# Altium PCB testing.PcbDoc
Units mil, origin at the board's own origin, x right, y up, seen from the top; angles counter-clockwise.
Board outline 1968.5 x 1181.1 mil, 2 copper layers (Top Layer, Bottom Layer); 22 components, 13 nets, 66 pads, 3 vias.
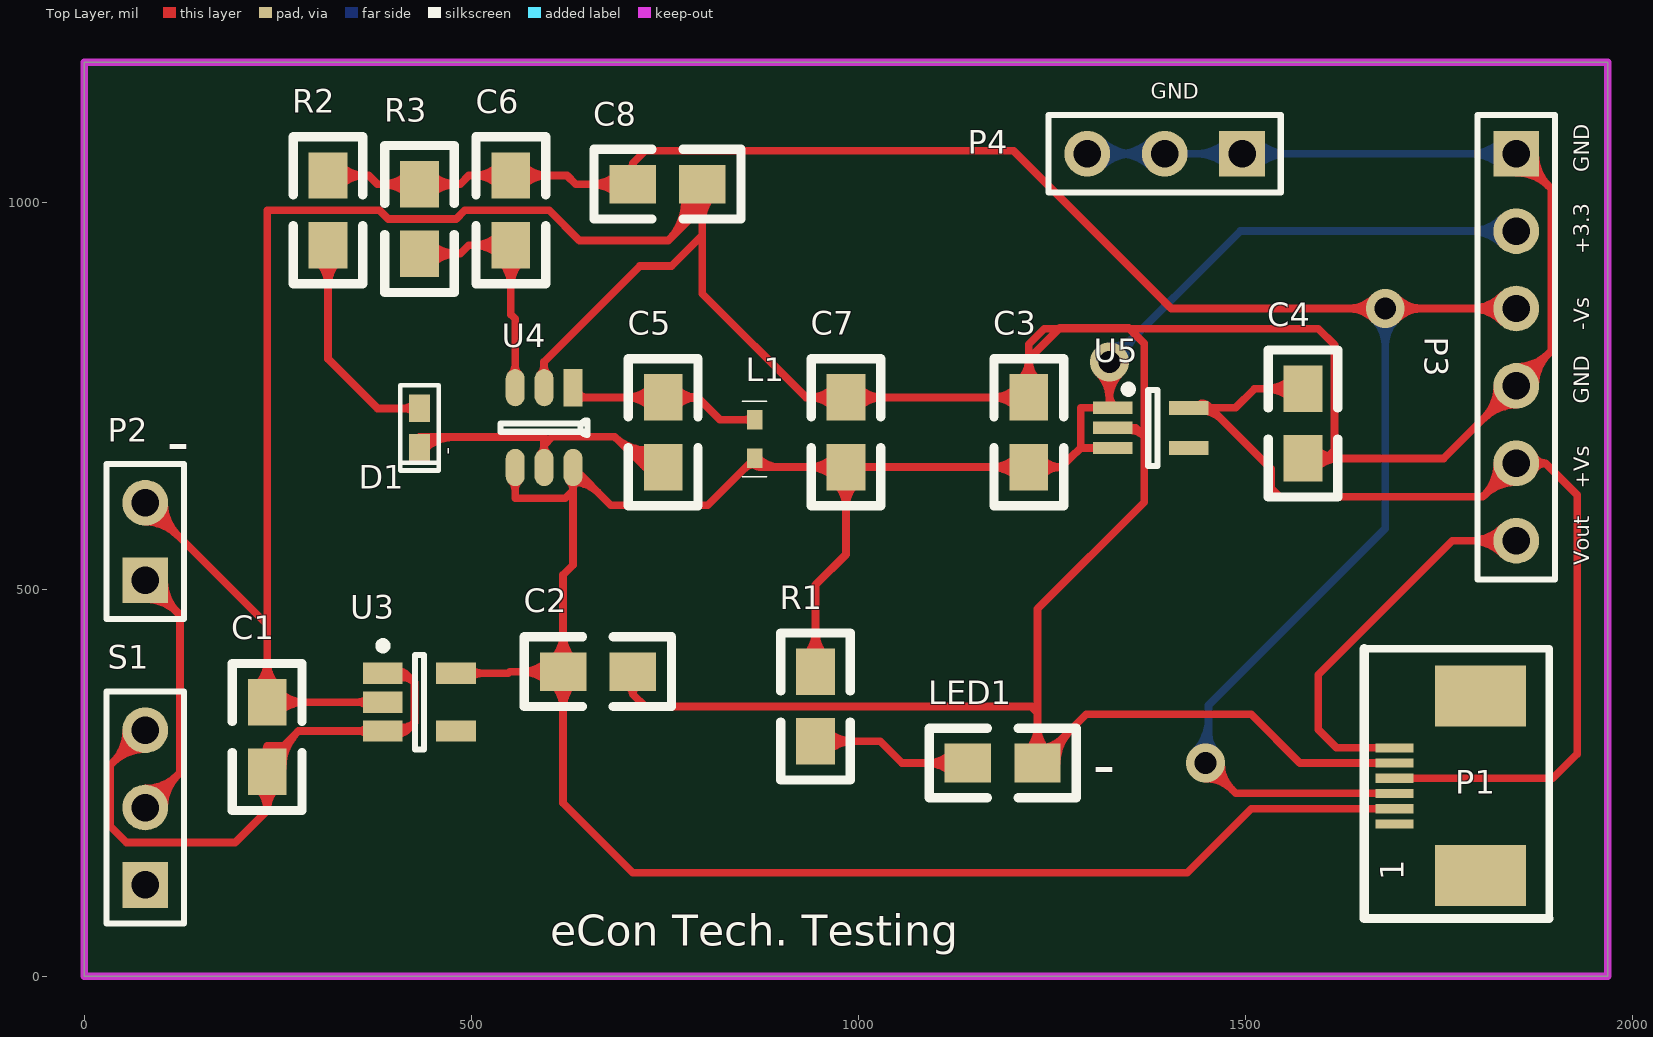
[diagram p0: Top Layer view]
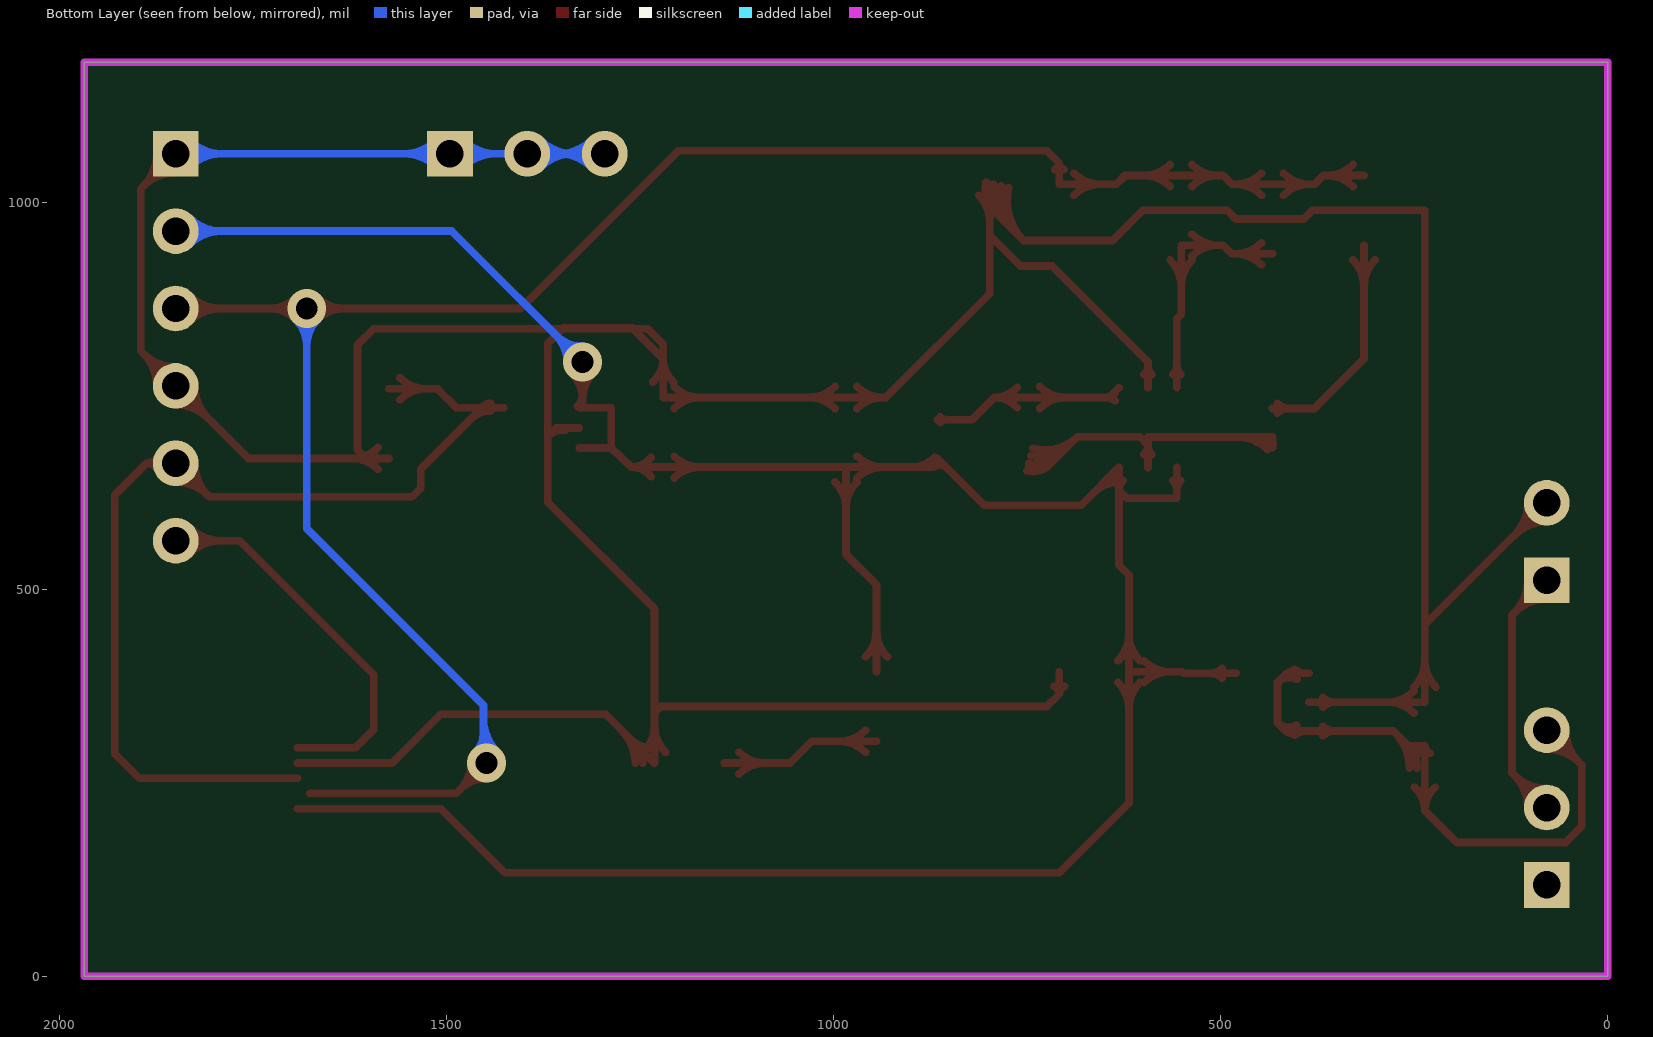
[diagram p1: Bottom Layer view, seen from below]

## Layer stack, top to bottom
Top Layer: signal copper 1.4
Dielectric: dielectric 12.6, FR-4, Dk 4.8
Bottom Layer: signal copper 1.4

## Board outline
0,0 0,1181.1 1968.5,1181.1 1968.5,0 0,0

## Design rules (kind name [scope] priority, off if disabled: settings)
AssemblyTestPointUsage [All] p1 off:
AssemblyTestpoint [All] p1 off: testpointundercomponent=TRUE minsize=40 maxsize=100 preferedsize=60 minholesize=0 maxholesize=40 preferedholesize=32 testpointgrid=1 usegrid=TRUE gridtolerance=0.01 allowsidetop=TRUE allowsidebottom=TRUE
Clearance [All] p1 off: gap=10
ComponentClearance [All] p1 off: gap=10 collisioncheckmode=3 verticalgap=10 showdistances=FALSE
DiffPairsRouting [All] p1 off: maxlimit=10 minlimit=10 mostfreqgap=10 maxuncoupledlength=500
FabricationTestPointUsage [All] p1 off: valid=0 allowmultiple=FALSE
FabricationTestpoint [All] p1 off: side=3 testpointundercomponent=TRUE minsize=40 maxsize=100 preferedsize=60 minholesize=0 maxholesize=40 preferedholesize=32 testpointgrid=1 allowsidetop=TRUE allowsidebottom=TRUE usegrid=TRUE gridtolerance=0.01
FanoutControl Fanout_BGA [IsBGA] p1 off: bgadir=Out bgaviamode=Centered fanoutstyle=Auto fanoutdirection=Alternating viagrid=1 // Fanout_BGA (Default Rule)
FanoutControl Fanout_LCC [IsLCC] p2 off: bgadir=Out bgaviamode=Centered fanoutstyle=Auto fanoutdirection=Alternating viagrid=1 // Fanout_LCC (Default Rule)
FanoutControl Fanout_SOIC [IsSOIC] p3 off: bgadir=Out bgaviamode=Centered fanoutstyle=Auto fanoutdirection=Alternating viagrid=1 // Fanout_SOIC (Default Rule)
FanoutControl Fanout_Small [(CompPinCount < 5)] p4 off: bgadir=Out bgaviamode=Centered fanoutstyle=Auto fanoutdirection=OutThenIn viagrid=1 // Fanout_Small (Default Rule)
FanoutControl Fanout_Default [All] p5 off: bgadir=Out bgaviamode=Centered fanoutstyle=Auto fanoutdirection=Alternating viagrid=1 // Fanout_Default (Default Rule)
Height [All] p1 off: minheight=0 maxheight=1000 prefheight=500
HoleSize [All] p1 off: absolutevalues=TRUE maxlimit=100 minlimit=1 maxpercent=80.000 minpercent=20.000
HoleToHoleClearance [All] p1 off: gap=5 allowstackedmicrovias=TRUE
LayerPairs [All] p1 off: enforce=TRUE
MinimumSolderMaskSliver [All] p1 off: minsoldermaskwidth=5
NetAntennae [All] p1 off: netantennaetolerance=0
PasteMaskExpansion [All] p1 off: expansion=0
PlaneClearance [All] p1 off: clearance=20
PlaneConnect [All] p1 off: planeconnectstyle=Relief reliefexpansion=20 reliefentries=4 reliefconductorwidth=10 reliefairgap=10
PolygonConnect [All] p1: connectstyle=Relief reliefconductorwidth=10 reliefentries=4 polygonreliefangle="90 Angle"
RoutingCorners [All] p1 off: cornerstyle=45-Degree minsetback=100 maxsetback=100
RoutingVias [All] p1: holewidth=28 width=50 viastyle="Through Hole" minholewidth=28 minwidth=50 maxholewidth=28 maxwidth=50
SilkToSilkClearance [All] p1 off: silktosilkclearance=10
SilkscreenOverComponentPads [All] p1 off: minsilkscreentomaskgap=10
SolderMaskExpansion [All] p1: expansion=4
Width [All] p1 off: maxlimit=10 minlimit=10 preferedwidth=10
5 further rules are at their usual default settings.

## Components (designator, comment, footprint, x,y, rotation, side; value= is the part's Value field where it differs from the comment)
C1 "10uf" 0805 236.22,354.33 r270 top
C2 "1uf" 0805 708.66,393.7 r180 top
C3 "" 0805 1220.47,748.03 r270 top
C4 "" 0805 1574.8,669.29 r90 top
C5 "Cap Semi" 0805 748.03,748.03 r270 top
C6 "Cap Semi" 0805 551.18,944.88 r90 top
C7 "Cap Semi" 0805 984.25,748.03 r270 top
C8 "Cap Semi" 0805 708.66,1023.62 r0 top
D1 "Diode" D0402 433.07,708.66 r270 top
L1 "Res3" "0402 - MI" 866.14,669.29 r90 top
LED1 "Green" 0805 1141.73,275.59 r0 top
P1 "Header 6" "6P_0.5mm(FPC) - duplicate - duplicate" 1692.91,196.85 r90 top
P2 "Header 2" HDR1X2 78.74,511.81 r90 top
P3 "Header 6" HDR1X6 1850.39,1062.99 r270 top
P4 "Header 3" HDR1X3 1496.06,1062.99 r180 top
R1 "1K" 0805 944.88,393.7 r270 top
R2 "10" 0805 314.96,944.88 r90 top
R3 "180K" 0805 433.07,1023.62 r270 top
S1 "" HDR1X3 78.74,118.11 r90 top
U3 "RT9013 3.3" SOT23-5AM 433.07,354.33 r0 top
U4 "LT3483" LT3843 590.55,708.66 r270 top
U5 "RT9013 1.8" SC-70-5 1377.95,708.66 r0 top

## Footprints (in the part's own frame and the unit in brackets; to place one, negate y for a bottom-side part, rotate by r counter-clockwise, add the part's x,y. Pads: shape width x height; smd on the part's side, far side on the other; paste and mask are expansions set on the pad)
"6P_0.5mm(FPC) - duplicate - duplicate" [mm]
  rect 2x3 smd: 0(-1.69,-2.825) 7(4.2,-2.825)
  rect 0.3x1.25 smd mask+0.051: 1(0,0.001) 2(0.5,0.001) 3(1,0.001) 4(1.5,0.001) 5(2,0.001) 6(2.5,0.001)
  silkscreen extent -3.1,-5.08 5.75,0.99
"0402 - MI" [mil]
  rect 25x20 smd: 1(0,0) 2(50,0)
  silkscreen extent -24,-16 74,16
0805 [mil]
  rect 60x50 smd: 1(0,0) 2(90,0)
  silkscreen extent -50,-45 140,45
D0402 [mm]
  rect 0.9x0.7 smd: 1(-0.65,0) 2(0.65,0)
  silkscreen extent -1.4,-0.63 1.4,0.64
HDR1X2 [mm] "Connector; Header; 2 Position"
  rect 1.5x1.5 hole 0.9: 1(0,0)
  round 1.5 hole 0.9: 2(2.54,0)
  silkscreen extent -1.27,-1.27 3.81,1.27
HDR1X3 [mm] "Connector; Header; 3 Position"
  rect 1.5x1.5 hole 0.9: 1(0,0)
  round 1.5 hole 0.9: 2(2.54,0) 3(5.08,0)
  silkscreen extent -1.27,-1.27 6.35,1.27
HDR1X6 [mm] "Connector; Header; 6 Position"
  rect 1.5x1.5 hole 0.9: 1(0,0)
  round 1.5 hole 0.9: 2(2.54,0) 3(5.08,0) 4(7.62,0) 5(10.16,0) 6(12.7,0)
  silkscreen extent -1.27,-1.27 13.97,1.27
LT3843 [mm]
  rect 1.22x0.62 smd: 1(-1.321,1.041)
  oval 1.22x0.62 smd: 2(-1.321,0.091) 3(-1.321,-0.859) 4(1.299,-0.859) 5(1.299,0.091) 6(1.299,1.041)
  silkscreen extent -0.25,-1.33 0.23,1.52
SC-70-5 [mil]
  rect 51.18x16 smd: 1(-49,26) 2(-49,0) 3(-49,-26)
  rect 51.18x18 smd: 4(49,-26) 5(49,26)
  silkscreen extent -34,-49 9,55
SOT23-5AM [mm] "SOT23, 5-Leads, Body 2.9x1.7mm, Pitch 0.95mm, Lead Span 2.8mm, IPC Low Density"
  rect 1.3x0.7 smd: 1(-1.2,0.95) 2(-1.2,0) 3(-1.2,-0.95) 4(1.2,-0.95) 5(1.2,0.95)
  silkscreen extent -1.32,-1.55 0.15,1.97, body extent -0.9,-1.55 0.9,1.55, height 1.45

## Part data
C1 C2 C3 C4: library part Cap, "Capacitor"
C5 C6 C7 C8: "Capacitor (Semiconductor SIM Model)"
D1: "Default Diode"
L1: "Resistor"
LED1: library part LED0, "Typical INFRARED GaAs LED"
P1 P3: "Header, 6-Pin"
P2: "Header, 2-Pin"
P4: "Header, 3-Pin"
R1 R2 R3: library part Res2, "Resistor"
S1: library part Switch
U3 U5: library part "RT9013 SOT235"

## Via types
v1: diameter 50, hole 28, Top Layer to Bottom Layer, 3 vias

## Nets (pads, with @x,y where several pads share a name; then routed paths per layer and width w, separated by ;. In a path a pad name is that pad's centre, name@x,y a point inside that pad or via, vN(x,y) a via of type N, cw(c..) or ccw(c..) an arc to the next point about the centre after c; other vN are vias at no path point)
+3.3V: C2.2 C3.2 C7.2 L1.1 P1.2 P3.2 R1.1 U3.5 U4.4 U4.6 U5.1 U5.3 | length 4749.2
  Top Layer w10: U3.5 547.65,391.73 549.61,393.7 C2.2 ; U3.5@498.33,385.53 cw(c513.32,370.54) 513.32,391.73 cw(c513.32,412.93) U3.5@498.33,397.94 ; U4.4@551.65,640.61 cw(c539.35,628.31) 556.75,628.31 cw(c574.14,628.31) U4.4@561.84,640.61 ; U4.4 556.75,617.8 556.84,617.7 621.46,617.7 631.55,627.8 ; C2.2@599.52,379.56 ccw(c565.38,345.42) 565.38,393.7 ccw(c565.38,441.99) C2.2@599.52,407.84 ; C2.2@604.52,379.56 cw(c570.38,345.42) 618.66,345.42 cw(c666.95,345.42) C2.2@632.8,379.56 ; C2.2@604.52,407.84 ccw(c570.38,441.99) 618.66,441.99 ccw(c666.95,441.99) C2.2@632.8,407.84 ; U4.6@626.46,640.61 cw(c614.16,628.31) 631.55,628.31 cw(c648.95,628.31) U4.6@636.65,640.61 ; U4.6@631.55,638.5 cw(c631.55,592.59) 664.01,625.05 ; U4.6@631.55,648.5 cw(c631.55,626.73) 646.94,642.12 ; 853.34,656.49 cw(c866.14,643.68) L1.1@866.14,661.79 ; L1.1@862.61,663.26 ccw(c875.22,675.87) L1.1@875.22,658.03 ; L1.1@866.67,661.82 cw(c868.08,648.71) 877.4,658.03 ; L1.1@869.68,670.33 ccw(c899.36,700.01) 899.36,658.03 ; R1.1@930.74,412.84 ccw(c896.6,446.99) 944.88,446.99 ccw(c993.17,446.99) R1.1@959.02,412.84 ; R1.1 944.88,505.8 984.25,545.17 C7.2 ; C7.2@970.11,638.89 cw(c935.97,604.75) 984.25,604.75 cw(c1032.54,604.75) C7.2@998.39,638.89 ; C7.2@970.11,643.89 ccw(c935.97,609.75) 935.97,658.03 ccw(c935.97,706.32) C7.2@970.11,672.17 ; C3.2@1206.33,643.89 ccw(c1172.19,609.75) 1172.19,658.03 ccw(c1172.19,706.32) C3.2@1206.33,672.17 ; C3.2@1236.19,645.67 cw(c1261.64,625.65) 1261.64,658.03 ; C3.2@1236.19,670.39 ccw(c1261.64,690.41) 1261.64,658.03 ; v1@1310.5,779.65 cw(c1276.36,745.51) 1324.65,745.51 cw(c1372.93,745.51) v1@1338.79,779.65 ; 1324.65,752.3 ccw(c1346.6,752.3) U5.1@1331.08,736.78 ; v1(1324.65,793.8) U5.1@1324.65,734.66 ; U5.3 1287.65,682.66 ; U5.1 U5.1@1324.65,734.66 ; P1.2 1507.87,216.54 1425.2,133.86 708.66,133.86 618.66,223.86 C2.2 ; C2.2 618.66,518.8 631.55,531.69 631.55,627.8 ; 631.55,627.8 U4.6 680.27,608.8 805.65,608.8 L1.1 877.4,658.03 ; 877.4,658.03 C7.2 ; C7.2 C3.2 1261.65,658.03 ; 1261.65,658.03 1287.65,682.66 ; 1287.65,682.66 1287.65,734.66 U5.1@1324.65,734.66
  Bottom Layer w10: v1(1324.65,793.8) 1493.84,962.99 P3.2 ; v1@1324.65,813.8 ccw(c1324.65,862.08) 1358.79,827.94 ccw(c1392.93,793.8) v1@1344.65,793.8 ; P3.2@1833.05,945.65 ccw(c1791.18,903.78) 1791.18,962.99 ccw(c1791.18,1022.21) P3.2@1833.05,980.33 ; P3.2@1840.12,952.72 ccw(c1815.32,927.92) 1815.32,962.99 ccw(c1815.32,998.06) P3.2@1840.12,973.26
+3.7V: P1.1
+4.2V: P2.1 S1.2 | length 627.1
  Top Layer w10: S1.2 123.65,263.02 123.65,466.91 P2.1 ; S1.2@78.74,232.64 ccw(c78.74,267.71) 103.54,242.91 ccw(c128.34,218.11) S1.2@93.27,218.11 ; S1.2@78.74,242.64 ccw(c78.74,301.85) 120.61,259.98 ccw(c162.48,218.11) S1.2@103.27,218.11 ; P2.1@78.74,487.28 cw(c78.74,428.07) 120.61,469.94 cw(c162.48,511.81) P2.1@103.27,511.81 ; P2.1@78.74,497.28 cw(c78.74,462.21) 103.54,487.01 cw(c128.34,511.81) P2.1@93.27,511.81
+VS: C4.2 P1.4 P3.5 U5.5 | length 1660
  Top Layer w10: U5.5 1454.65,734.66 ; U5.5@1443.54,730.66 cw(c1443.54,694.2) 1469.32,719.98 ; U5.5@1443.54,740.66 cw(c1443.54,728.35) U5.5@1452.25,737.05 ; C4.2@1560.66,745.15 ccw(c1526.52,711.01) 1526.52,759.29 ccw(c1526.52,807.58) C4.2@1560.66,773.43 ; C4.2 1512.28,759.29 1487.65,734.66 1454.65,734.66 ; P1.4 1897.64,255.91 1929.13,287.4 1929.13,622.05 1888.19,662.99 ; P3.5@1825.87,662.99 cw(c1766.65,662.99) 1808.52,621.12 cw(c1850.39,579.25) P3.5@1850.39,638.46 ; P3.5@1835.87,662.99 cw(c1800.79,662.99) 1825.59,638.19 cw(c1850.39,613.39) P3.5@1850.39,648.46 ; P3.5@1872.79,653 cw(c1888.19,646.14) 1888.19,662.99 ; P3.5@1872.79,672.98 ccw(c1888.19,679.85) 1888.19,662.99 ; U5.5@1446.37,731.83 cw(c1453.2,725) 1453.2,734.66 ; U5.5@1446.37,731.83 cw(c1453.2,725) 1453.2,734.66 ; U5.5@1446.37,731.83 cw(c1453.2,725) 1453.2,734.66 ; U5.5@1446.37,737.49 ccw(c1453.2,744.32) 1453.2,734.66 ; U5.5@1446.37,737.49 ccw(c1453.2,744.32) 1453.2,734.66 ; U5.5@1446.37,737.49 ccw(c1453.2,744.32) 1453.2,734.66 ; 1454.65,734.66 1533.65,655.66 1533.65,630.8 1544.65,619.8 1807.2,619.8 P3.5 1888.19,662.99
-VS: C6.2 C8.1 P1.3 P3.3 R2.2 R3.1 | length 3637.2
  Top Layer w10: R2.2 367.65,1034.88 378.91,1023.62 R3.1 485.65,1023.62 496.91,1034.88 C6.2 623.65,1034.88 634.91,1023.62 C8.1 708.66,1050.83 ; R2.2@329.1,1020.74 cw(c363.24,986.6) 363.24,1034.88 cw(c363.24,1083.17) R2.2@329.1,1049.02 ; R3.1@418.93,1009.48 ccw(c384.79,975.34) 384.79,1023.62 ccw(c384.79,1071.91) R3.1@418.93,1037.76 ; R3.1@447.21,1009.48 cw(c481.36,975.34) 481.36,1023.62 cw(c481.36,1071.91) R3.1@447.21,1037.76 ; C6.2@537.04,1020.74 ccw(c502.9,986.6) 502.9,1034.88 ccw(c502.9,1083.17) C6.2@537.04,1049.02 ; C6.2@565.32,1020.74 cw(c599.47,986.6) 599.47,1034.88 cw(c599.47,1083.17) C6.2@565.32,1049.02 ; C8.1@689.52,1009.48 ccw(c655.38,975.34) 655.38,1023.62 ccw(c655.38,1071.91) C8.1@689.52,1037.76 ; C8.1@702.7,1042.71 ccw(c700.16,1050.83) 708.66,1050.83 ; C8.1@714.63,1042.71 cw(c717.16,1050.83) 708.66,1050.83 ; v1@1448.82,255.59 cw(c1448.82,207.31) 1482.96,241.45 cw(c1517.1,275.59) v1@1468.82,275.59 ; v1(1448.82,275.59) 1487.87,236.54 P1.3@1677.17,236.54 ; v1@1666.96,848.85 ccw(c1632.82,814.71) 1632.82,862.99 ccw(c1632.82,911.28) v1@1666.96,877.13 ; v1@1695.24,848.85 cw(c1729.39,814.71) 1729.39,862.99 cw(c1729.39,911.28) v1@1695.24,877.13 ; P3.3@1833.05,845.65 ccw(c1791.18,803.78) 1791.18,862.99 ccw(c1791.18,922.21) P3.3@1833.05,880.33 ; P3.3@1840.12,852.72 ccw(c1815.32,827.92) 1815.32,862.99 ccw(c1815.32,898.06) P3.3@1840.12,873.26 ; P3.3 v1(1681.1,862.99) 1404.45,862.99 1200.63,1066.81 724.65,1066.81 708.66,1050.83
  Bottom Layer w10: v1@1434.68,289.73 ccw(c1391.03,333.38) 1452.76,333.38 ; v1@1441.75,282.66 ccw(c1415.17,309.24) 1452.76,309.24 ; v1(1448.82,275.59) 1452.76,271.65 1452.76,350.39 1681.1,578.74 v1(1681.1,862.99) ; 1452.76,314.37 ccw(c1487.6,314.37) v1@1462.96,289.73 ; v1@1666.96,848.85 cw(c1632.82,814.71) 1681.1,814.71 cw(c1729.39,814.71) v1@1695.24,848.85
GND: C1.1 C2.1 C3.1 C4.1 C7.1 C8.2 LED1.2 P1.5 P2.2 P3.1 P3.4 P4.1 P4.2 P4.3 U3.2 U4.2 U5.2 | length 8832.7
  Top Layer w10: P2.2@78.74,587.28 cw(c78.74,528.07) 120.61,569.94 cw(c162.48,611.81) P2.2@103.27,611.81 ; P2.2@78.74,597.28 cw(c78.74,562.21) 103.54,587.01 cw(c128.34,611.81) P2.2@93.27,611.81 ; P2.2 236.22,454.33 ; C1.1@222.08,373.47 ccw(c187.94,407.62) 236.22,407.62 ccw(c284.5,407.62) C1.1@250.36,373.47 ; C1.1@250.36,340.19 cw(c284.5,306.05) 284.5,354.33 cw(c284.5,402.62) C1.1@250.36,368.47 ; U3.2@367.81,348.12 ccw(c352.82,333.14) 352.82,354.33 ccw(c352.82,375.53) U3.2@367.81,360.54 ; U3.2 C1.1 236.22,454.33 ; U4.2@589.06,777.57 ccw(c576.76,789.87) 594.15,789.87 ccw(c611.54,789.87) U4.2@599.24,777.57 ; U4.2 594.15,794.3 717.65,917.8 758.66,917.8 798.66,957.8 ; C2.1@701.55,375.01 cw(c697.62,364.69) 708.66,364.69 ; C2.1 708.66,364.69 ; C2.1@715.78,375.01 ccw(c719.71,364.69) 708.66,364.69 ; 767.38,963.53 ccw(c723.58,1007.34) C8.2@783.92,1021.36 ; C8.2@774.18,1019.1 cw(c702.91,1002.54) 754.65,950.8 ; 780.12,976.27 ccw(c744.25,1012.14) C8.2@793.66,1023.62 ; C8.2@784.52,1009.48 cw(c750.38,975.34) 798.66,975.34 cw(c846.95,975.34) C8.2@812.8,1009.48 ; 792.85,989 ccw(c764.92,1016.94) C8.2@803.4,1025.88 ; C8.2 798.66,994.81 ; C7.1@970.11,733.89 ccw(c935.97,699.75) 935.97,748.03 ccw(c935.97,796.32) C7.1@970.11,762.17 ; C7.1@998.39,733.89 cw(c1032.54,699.75) 1032.54,748.03 cw(c1032.54,796.32) C7.1@998.39,762.17 ; C3.1@1206.33,733.89 ccw(c1172.19,699.75) 1172.19,748.03 ccw(c1172.19,796.32) C3.1@1206.33,762.17 ; C3.1@1207.13,767.93 ccw(c1180.38,797.79) 1220.47,797.79 ; LED1.2@1217.59,289.73 ccw(c1183.45,323.88) 1231.73,323.88 ccw(c1280.02,323.88) LED1.2@1245.87,289.73 ; C3.1@1233.82,767.93 cw(c1260.56,797.79) 1220.47,797.79 ; LED1.2@1236.73,295.59 ccw(c1236.73,331.8) 1262.34,306.2 ; LED1.2@1246.73,275.59 cw(c1282.94,275.59) 1257.34,301.2 ; LED1.2@1256.73,275.59 cw(c1317.09,275.59) 1274.41,318.27 ; U5.2 1358.78,708.66 1369.65,697.8 ; U5.2@1346.9,705.68 cw(c1350.14,678.3) 1369.64,697.8 ; C4.1 1604.65,669.29 ; C4.1@1588.95,655.15 cw(c1623.09,621.01) 1623.09,669.29 cw(c1623.09,717.58) C4.1@1588.95,683.43 ; P1.5 1570.87,275.59 1507.87,338.58 1294.72,338.58 LED1.2 1231.73,340.8 ; P3.4@1825.87,762.99 cw(c1766.65,762.99) 1808.52,721.12 cw(c1850.39,679.25) P3.4@1850.39,738.46 ; P3.4@1835.87,762.99 cw(c1800.79,762.99) 1825.59,738.19 cw(c1850.39,713.39) P3.4@1850.39,748.46 ; P3.4@1850.39,777.52 ccw(c1850.39,812.59) 1875.19,787.79 ccw(c1899.99,762.99) P3.4@1864.92,762.99 ; P3.4@1850.39,787.52 ccw(c1850.39,846.73) 1892.26,804.86 ccw(c1934.14,762.99) P3.4@1874.92,762.99 ; P3.1@1850.39,1038.46 cw(c1850.39,979.25) 1892.26,1021.12 cw(c1934.14,1062.99) P3.1@1874.92,1062.99 ; P3.1@1850.39,1048.46 cw(c1850.39,1013.39) 1875.19,1038.19 cw(c1899.99,1062.99) P3.1@1864.92,1062.99 ; P3.1 1895.65,1017.74 1895.65,808.24 P3.4 1756.69,669.29 1604.65,669.29 ; 236.22,454.33 236.22,989.46 236.65,989.88 381.39,989.88 392.65,978.62 480.39,978.62 491.65,989.88 600.65,989.88 639.73,950.8 754.65,950.8 ; 708.66,364.69 724.65,348.7 1223.83,348.7 1231.73,340.8 ; 754.65,950.8 798.66,994.81 ; 798.66,957.8 798.66,994.81 ; 798.66,957.8 798.66,882.02 932.65,748.03 C7.1 C3.1 1220.47,797.8 ; 798.66,994.81 cw(c809.41,994.81) 805.65,1004.88 ccw(c809.41,994.81) 798.66,994.81 ; 798.66,994.81 ccw(c787.91,994.81) 791.67,1004.88 cw(c787.91,994.81) 798.66,994.81 ; 1220.47,797.8 1220.47,816.62 1240.65,836.8 1259.47,836.8 ; 1220.47,797.8 1259.47,836.8 ; 1231.73,340.8 1231.73,474.8 1369.65,612.71 1369.65,697.8 ; 1259.47,836.8 1350.65,836.8 ; 1259.47,836.8 1260.47,837.8 1349.65,837.8 1350.65,836.8 ; 1350.65,836.8 1594.65,836.8 1615.65,815.8 1615.65,680.29 1604.65,669.29 ; 1350.65,836.8 1369.65,817.8 1369.65,697.8 ; 1604.64,669.29 cw(c1604.64,681.55) 1593.3,676.89 ccw(c1604.64,681.55) 1604.64,669.29 ; 1604.64,669.29 ccw(c1604.64,657.03) 1593.3,661.69 cw(c1604.64,657.03) 1604.64,669.29
  Bottom Layer w10: P4.3 P4.2 P4.1 P3.1 ; P4.3@1306.34,1052.72 cw(c1331.14,1027.92) 1331.14,1062.99 cw(c1331.14,1098.06) P4.3@1306.34,1073.26 ; P4.3@1313.41,1045.65 cw(c1355.28,1003.78) 1355.28,1062.99 cw(c1355.28,1122.21) P4.3@1313.41,1080.33 ; P4.2@1378.72,1045.65 ccw(c1336.85,1003.78) 1336.85,1062.99 ccw(c1336.85,1122.21) P4.2@1378.72,1080.33 ; P4.2@1385.79,1052.72 ccw(c1360.99,1027.92) 1360.99,1062.99 ccw(c1360.99,1098.06) P4.2@1385.79,1073.26 ; P4.1@1478.72,1045.65 ccw(c1436.85,1003.78) 1436.85,1062.99 ccw(c1436.85,1122.21) P4.1@1478.72,1080.33 ; P4.1@1485.79,1052.72 ccw(c1460.99,1027.92) 1460.99,1062.99 ccw(c1460.99,1098.06) P4.1@1485.79,1073.26 ; P4.1@1506.34,1052.72 cw(c1531.14,1027.92) 1531.14,1062.99 cw(c1531.14,1098.06) P4.1@1506.34,1073.26 ; P4.1@1513.41,1045.65 cw(c1555.28,1003.78) 1555.28,1062.99 cw(c1555.28,1122.21) P4.1@1513.41,1080.33 ; P3.1@1833.05,1045.65 ccw(c1791.18,1003.78) 1791.18,1062.99 ccw(c1791.18,1122.21) P3.1@1833.05,1080.33 ; P3.1@1840.12,1052.72 ccw(c1815.32,1027.92) 1815.32,1062.99 ccw(c1815.32,1098.06) P3.1@1840.12,1073.26
NetC5_1: C5.1 L1.2 U4.1 | length 456.4
  Top Layer w10: U4.1 644.18,748.03 ; U4.1@636.65,743.76 cw(c646.97,733.43) 646.97,748.03 ; U4.1@636.65,753.94 ccw(c650.92,768.22) 650.92,748.03 ; U4.1@637.35,744.58 cw(c644.18,739.55) 644.18,748.03 ; U4.1@638.07,751.91 ccw(c644.18,754.78) 644.18,748.03 ; C5.1@733.89,733.89 ccw(c699.75,699.75) 699.75,748.03 ccw(c699.75,796.32) C5.1@733.89,762.17 ; C5.1@762.96,734.73 cw(c792.64,708.28) 792.64,748.03 ; C5.1@762.96,761.34 ccw(c792.64,787.79) 792.64,748.03 ; L1.2@862.61,715.76 ccw(c854.07,707.22) 854.07,719.29 ccw(c854.07,731.36) L1.2@862.61,722.83 ; L1.2 821.39,719.29 792.65,748.03 ; 644.18,748.03 C5.1 792.65,748.03
NetC5_2: C5.2 D1.2 U4.5 | length 669.1
  Top Layer w10: D1.2@432.21,687.87 cw(c453.75,666.33) 453.75,696.8 ; D1.2 433.07,696.8 594.15,696.8 594.15,686.65 ; D1.2@439.28,680.8 cw(c477.9,642.18) 477.9,696.8 ; U4.5@589.07,674.43 ccw(c576.91,686.65) 594.15,686.65 ; U4.5 594.15,686.65 ; U4.5@599.23,674.43 cw(c611.39,686.65) 594.15,686.65 ; 697.59,685.09 ccw(c732.05,719.55) C5.2@745.31,672.65 ; 709.64,673.04 ccw(c737.36,700.76) C5.2@748.03,663.03 ; 721.7,660.98 ccw(c742.68,681.96) C5.2@750.75,653.41 ; C5.2@742.59,682.28 cw(c726.73,738.35) 685.53,697.14 ; C5.2 724.65,658.03 685.53,697.15 ; 594.15,686.65 604.65,697.15 685.53,697.15
NetC6_1: C6.1 R3.2 U4.3 | length 564.2
  Top Layer w10: R3.2 485.65,933.62 496.91,944.88 C6.1 551.18,855.36 556.75,849.8 U4.3 ; R3.2@447.21,919.48 cw(c481.36,885.34) 481.36,933.62 cw(c481.36,981.91) R3.2@447.21,947.76 ; C6.1@537.04,925.74 cw(c502.9,891.6) 551.18,891.6 cw(c599.47,891.6) C6.1@565.32,925.74 ; C6.1@537.04,930.74 ccw(c502.9,896.6) 502.9,944.88 ccw(c502.9,993.17) C6.1@537.04,959.02 ; U4.3@551.65,777.57 ccw(c539.35,789.87) 556.75,789.87 ccw(c574.14,789.87) U4.3@561.84,777.57
NetD1_1: D1.1 R2.1 | length 401.3
  Top Layer w10: R2.1@300.82,925.74 cw(c266.68,891.6) 314.96,891.6 cw(c363.24,891.6) R2.1@329.1,925.74 ; R2.1 314.96,797.8 378.96,733.8 433.07,733.8 D1.1 ; 410.78,733.8 ccw(c410.78,756.55) D1.1@426.86,740.46 ; 412.98,733.8 cw(c412.98,714.16) D1.1@426.86,728.04
NetLED1_1: LED1.1 R1.2 | length 360.2
  Top Layer w10: R1.2 1028.65,303.7 1056.76,275.59 LED1.1 ; R1.2@959.02,289.56 cw(c993.17,255.42) 993.17,303.7 cw(c993.17,351.99) R1.2@959.02,317.84 ; LED1.1@1122.59,261.45 ccw(c1088.45,227.31) 1088.45,275.59 ccw(c1088.45,323.88) LED1.1@1122.59,289.73
VBTRY: C1.2 S1.3 U3.1 U3.3 | length 1329
  Top Layer w10: S1.3@54.21,318.11 cw(c-5,318.11) 36.87,276.24 cw(c78.74,234.37) S1.3@78.74,293.58 ; S1.3@64.21,318.11 cw(c29.14,318.11) 53.94,293.31 cw(c78.74,268.51) S1.3@78.74,303.58 ; S1.3 33.65,273.02 33.65,193.8 54.65,172.8 194.65,172.8 236.22,214.37 C1.2 236.22,297.8 ; C1.2@222.83,244.48 cw(c195.69,214.37) 236.22,214.37 cw(c276.75,214.37) C1.2@249.61,244.48 ; C1.2@229.44,288.15 ccw(c225.97,297.79) 236.22,297.79 ; C1.2@236.22,289.33 ccw(c236.22,320.3) 258.12,298.4 ; C1.2@236.56,289.33 ccw(c237.06,318.24) 257.51,297.79 ; C1.2@243,288.15 cw(c246.47,297.79) 236.22,297.79 ; C1.2@246.22,269.33 cw(c287.68,269.33) 258.36,298.65 ; C1.2@254.2,278.08 cw(c269.69,285.62) 257.51,297.79 ; C1.2@256.22,269.33 cw(c321.82,269.33) 275.43,315.72 ; U3.3@367.81,310.72 ccw(c352.82,295.73) 352.82,316.93 ccw(c352.82,338.12) U3.3@367.81,323.14 ; U3.1 414.65,391.73 ; U3.3@397.03,315.87 ccw(c405.46,330.52) 417.42,318.57 ; U3.1@397.1,392.83 cw(c404.69,377.49) 416.79,389.59 ; U3.1@401.53,383.86 cw(c411.21,364.3) 426.64,379.73 ; U3.3@402.02,324.54 ccw(c412.21,342.23) 426.65,327.79 ; U3.3@404.52,311.48 cw(c415.78,302.58) 415.78,316.93 ; U3.3@404.52,322.38 ccw(c415.78,331.28) 415.78,316.93 ; U3.1@404.8,386.65 cw(c414.64,379.65) 414.64,391.73 ; U3.1@404.8,396.82 ccw(c414.64,403.81) 414.64,391.73 ; 236.22,297.8 257.51,297.8 ; 257.51,297.8 276.65,316.93 U3.3 415.78,316.93 ; 414.65,391.73 426.65,379.73 ; 415.78,316.93 426.65,327.8 ; 426.65,327.8 426.65,379.73
VOUT: P1.6 P3.6 | length 654.8
  Top Layer w10: P1.6 1618.11,295.28 1594.49,318.9 1594.49,389.76 1767.72,562.99 P3.6 ; P3.6@1833.05,545.65 ccw(c1791.18,503.78) 1791.18,562.99 ccw(c1791.18,622.21) P3.6@1833.05,580.33 ; P3.6@1840.12,552.72 ccw(c1815.32,527.92) 1815.32,562.99 ccw(c1815.32,598.06) P3.6@1840.12,573.26
pads on no net: P1.0 P1.7 S1.1 U3.4 U5.4

## Keep-outs
Keep-Out Layer:
  the board outline again, w10

## Silkscreen, mask and mechanical layers (free items; w line width, h text height)
Top Overlay:
  text "GND" at 1377.95,1133.86 h20
  text "GND" at 1944.88,1039.37 h20 r90
  text "+3.3" at 1944.88,933.07 h20 r90
  text "-Vs" at 1944.88,834.65 h20 r90
  text "GND" at 1944.88,740.16 h20 r90
  text "-" at 106.3,661.81 h60
  text "+Vs" at 1944.88,629.92 h20 r90
  text "Vout" at 1944.88,531.5 h20 r90
  text "-" at 1303.15,244.49 h60
  text "eCon Tech. Testing" at 602.36,39.37 h40

## Text inside footprints (layer, text, board x,y; h text height)
D1: Top Overlay "-" at 463.07,683.66 h20 r270
P1: Top Overlay "1" at 1705.2,124.02 h30 r90